# Altium PCB PCBPIC80_A3987.PcbDoc
Units mm, origin at the board's own origin, x right, y up, seen from the top; angles counter-clockwise.
Board outline 152.4 x 101.6 mm, 2 copper layers (Top Layer, Bottom Layer); 81 components, 99 nets, 380 pads, 152 vias.
Unrouted connection lines stored in the file: 1.
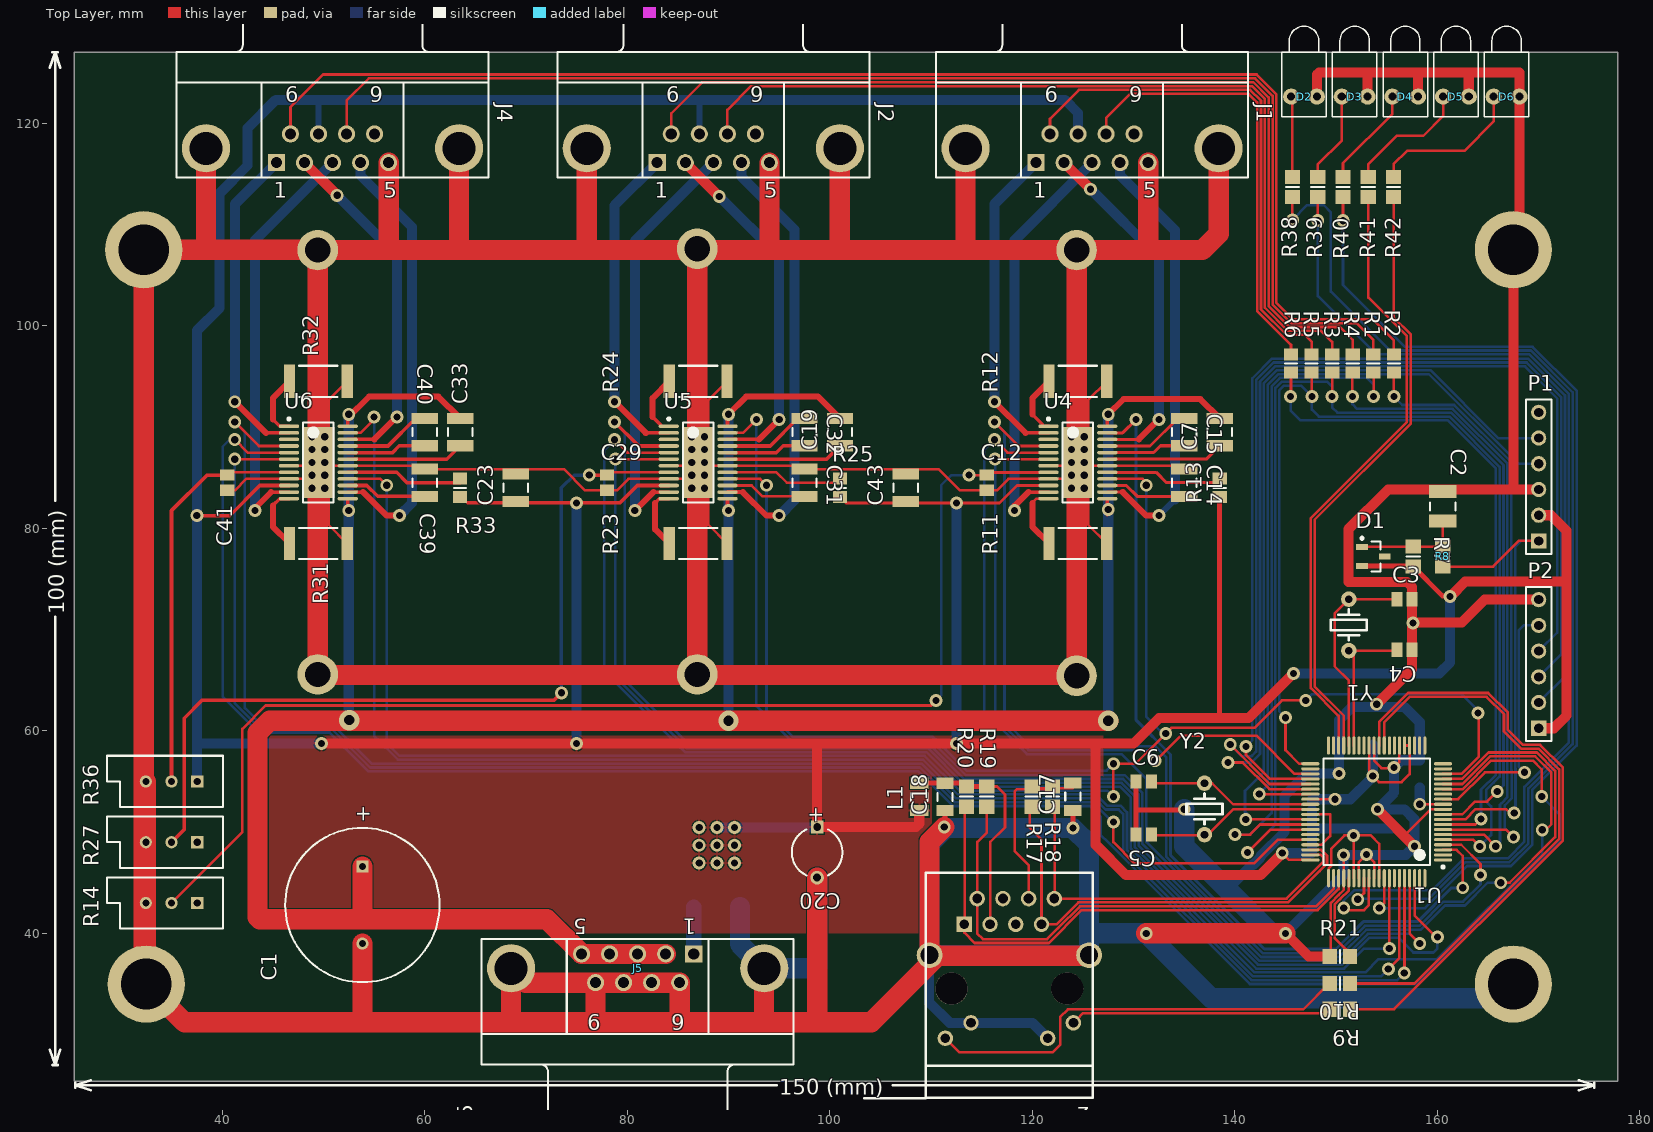
[diagram p0: Top Layer view]
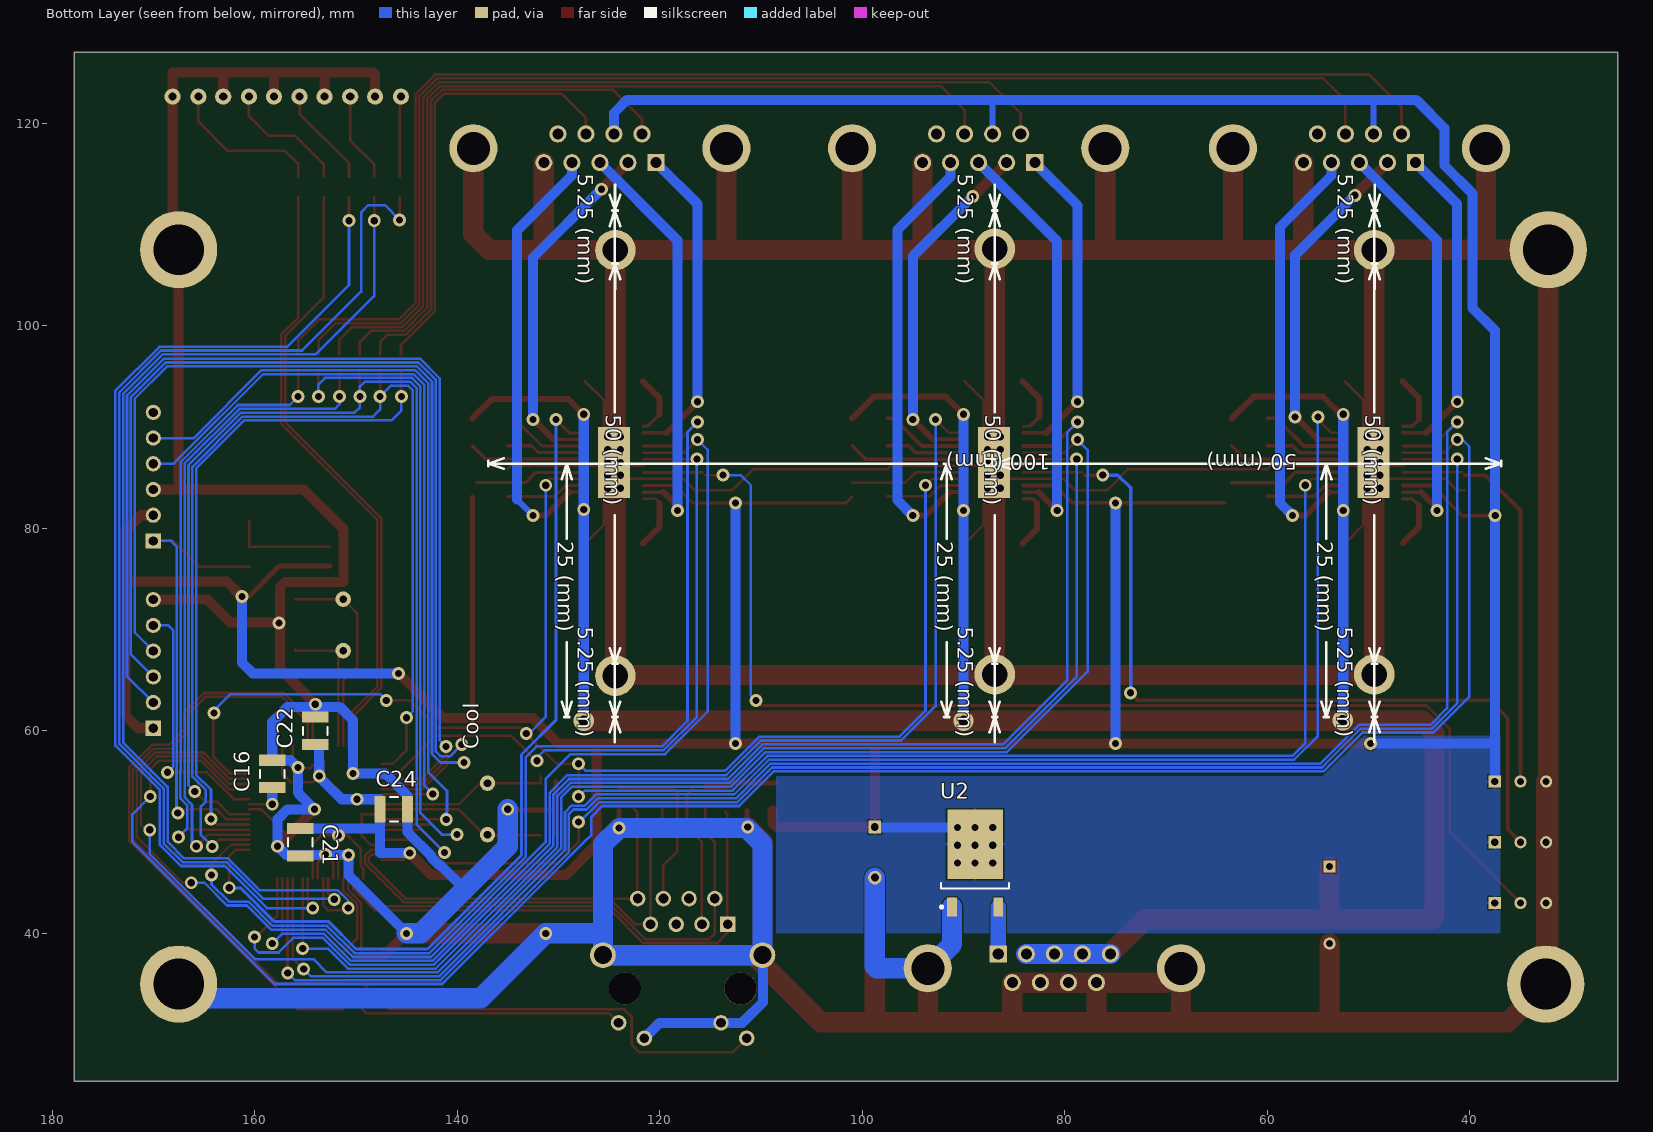
[diagram p1: Bottom Layer view, seen from below]

## Layer stack, top to bottom
Top Layer: signal copper 0.0356
Dielectric: dielectric 0.32, FR-4, Dk 4.8
Bottom Layer: signal copper 0.0356

## Board outline
25.4,25.4 177.8,25.4 177.8,127 25.4,127

## Design rules (kind name [scope] priority, off if disabled: settings)
Clearance [All] p1: gap=0.127
PolygonConnect [All] p1: connectstyle=Relief reliefconductorwidth=0.254 reliefentries=4 polygonreliefangle="90 Angle"
RoomDefinition SheetPIC80_A9387 [InComponentClass('SheetPIC80_A9387')] p1: confinementstyle=ConfineOut formatcopy=TRUE lockcomponents=FALSE outline 140,-12.1 161,-12.1 161,21.8 140,21.8
RoutingVias [All] p1: holewidth=0.711 width=1.27 viastyle="Through Hole" minholewidth=0.711 minwidth=1.27 maxholewidth=0.711 maxwidth=1.27
SilkscreenOverComponentPads [All] p1: minsilkscreentomaskgap=0.254
SolderMaskExpansion [All] p1: expansion=0.102
Width [All] p1: maxlimit=2.54 minlimit=0.254 preferedwidth=0.254
27 further rules are at their usual default settings.

## Components (designator, comment, footprint, x,y, rotation, side; value= is the part's Value field where it differs from the comment)
*2 "LU1T516-43" EthernetCON 117.729,34.544 r270 top
C1 "Cap Pol1" RB7.6-15 53.848,42.799 r90 top
C2 "Cap" CAPC3225N 160.528,82.169 r270 top
C3 "Cap" CAPC2012L 156.75,73 r0 top
C4 "Cap" CAPC2012L 156.75,68 r180 top
C5 "Cap" CAPC2012L 131,49.75 r180 top
C6 "Cap" CAPC2012L 131,55 r0 top
C7 "Cap" RESC3225L 138.5,89.5 r90 top
C12 "Cap" CAPC2012L 115.5,84.5 r90 top
C14 "Cap" RESC3225L 135,84.5 r270 top
C15 "Cap" RESC3225L 135,89.5 r270 top
C16 "Cap" CAPC3225L 158.25,55.75 r90 bottom
C17 "Cap" CAPC3216L 124,53.5 r90 top
C18 "Cap" CAPC3216L 111.379,53.467 r90 top
C19 "Cap" RESC3225L 101,89.5 r90 top
C20 "Cap Pol1" CAPPR5-5x5 98.75,48 r270 top
C21 "Cap" CAPC3225L 155.5,49 r270 bottom
C22 "Cap" CAPC3225L 154,60 r90 bottom
C23 "Cap" CAPC3225L 69,84 r90 top
C24 "Cap" CAPC3225L 146.25,52.25 r180 bottom
C29 "Cap" CAPC2012L 78,84.5 r90 top
C31 "Cap" RESC3225L 97.5,84.5 r270 top
C32 "Cap" RESC3225L 97.5,89.5 r270 top
C33 "Cap" RESC3225L 63.5,89.5 r90 top
C39 "Cap" RESC3225L 60,84.5 r270 top
C40 "Cap" RESC3225L 60,89.5 r270 top
C41 "Cap" CAPC2012L 40.5,84.5 r90 top
C43 "Cap" CAPC3225L 107.5,84 r90 top
Cool "Cooler" "PCBComponent_1 - duplicate" 37,61.5 r0 bottom
D1 "Diode" SOT95P240-3N 153.67,77.216 r0 top
D2 "Power" LED-1 146.825,122.625 r90 top
D3 "Run" LED-1 151.825,122.625 r90 top
D4 "Alfa" LED-1 156.825,122.625 r90 top
D5 "Delta" LED-1 161.825,122.625 r90 top
D6 "Focus" LED-1 166.825,122.625 r90 top
J1 "D Connector 9" D-SUB-9 125.9,116.1 r0 top
J2 "D Connector 9" D-SUB-9 88.5,116.1 r0 top
J4 "D Connector 9" D-SUB-9 50.9,116.1 r0 top
J5 "D Connector 9" D-SUB-9 81.026,37.973 r180 top
L1 "Inductor" INDC3216AL 108.839,53.467 r90 top
P1 "Программатор" HDR1X6 170,78.75 r90 top
P2 "SPI" HDR1X6 170,60.25 r90 top
R1 "Res2" RESC2012N 153.67,96.266 r270 top
R2 "Res2" RESC2012N 155.702,96.266 r270 top
R3 "Res2" RESC2012N 149.606,96.266 r270 top
R4 "Res2" RESC2012N 151.638,96.266 r270 top
R5 "Res2" RESC2012N 147.574,96.266 r270 top
R6 "Res2" RESC2012N 145.542,96.266 r270 top
R7 "Res2" RESC2012M 157.607,77.216 r270 top
R8 "Res2" RESC2012M 160.528,77.216 r90 top
R9 "Res2" RESC2012M 150.368,32.512 r180 top
R10 "Res2" RESC2012M 150.368,35.052 r180 top
R11 "Res2" RESC6332L 124.5,78.5 r180 top
R12 "Res2" RESC6332L 124.5,94.5 r180 top
R13 "Res2" RESC2012N 138.5,84 r90 top
R14 "RPot" VR5 35,43 r180 top
R17 "Res2" RESC2012M 120,53.5 r270 top
R18 "Res2" RESC2012M 122,53.5 r270 top
R19 "Res2" RESC2012M 115.5,53.5 r270 top
R20 "Res2" RESC2012M 113.5,53.5 r270 top
R21 "Res2" RESC2012M 150.368,37.719 r0 top
R23 "Res2" RESC6332L 87,78.5 r180 top
R24 "Res2" RESC6332L 87,94.5 r180 top
R25 "Res2" RESC2012N 101,84 r90 top
R27 "RPot" VR5 35,49 r180 top
R31 "Res2" RESC6332L 49.5,78.5 r180 top
R32 "Res2" RESC6332L 49.5,94.5 r180 top
R33 "Res2" RESC2012N 63.5,84 r90 top
R36 "RPot" VR5 35,55 r180 top
R38 "Res2" RESC2012M 145.675,113.7 r90 top
R39 "Res2" RESC2012M 148.175,113.7 r90 top
R40 "Res2" RESC2012M 150.675,113.7 r90 top
R41 "Res2" RESC2012M 153.175,113.7 r90 top
R42 "Res2" RESC2012M 155.675,113.7 r90 top
U1 "PIC18F87J60-I/PT" TQFP-PT80_N 154,52 r180 top
U2 "LM1117DT-3.3" TD03B_N 88.85,46.95 r90 bottom
U4 "A3987" "TSOP65P640_HS-24AM - duplicate" 124.5,86.5 r0 top
U5 "A3987" "TSOP65P640_HS-24AM - duplicate" 87,86.5 r0 top
U6 "A3987" "TSOP65P640_HS-24AM - duplicate" 49.5,86.5 r0 top
Y1 "XTAL" Quartz 151.25,73 r270 top
Y2 "XTAL" Quartz 137,49.75 r90 top

## Footprints (in the part's own frame and the unit in brackets; to place one, negate y for a bottom-side part, rotate by r counter-clockwise, add the part's x,y. Pads: shape width x height; smd on the part's side, far side on the other; paste and mask are expansions set on the pad)
CAPC2012L [mm] "Chip Capacitor, Body 2.0x1.3mm, IPC High Density"
  rect 1.1x1.4 smd: 1(-0.75,0) 2(0.75,0)
  body extent -1.1,-0.72 1.1,0.72, height 1.4
CAPC3216L [mm] "Chip Capacitor, Body 3.2x1.6mm, IPC High Density"
  rect 1.1x1.7 smd: 1(-1.35,0) 2(1.35,0)
  silkscreen extent -0.4,-0.75 0.4,0.75, body extent -1.7,-0.9 1.7,0.9, height 1.3
CAPC3225L [mm] "Chip Capacitor, Body 3.2x2.5mm, IPC High Density"
  rect 1.1x2.6 smd: 1(-1.35,0) 2(1.35,0)
  silkscreen extent -0.4,-1.2 0.4,1.2, body extent -1.7,-1.35 1.7,1.35, height 1.5
CAPC3225N [mm] "Chip Capacitor, Body 3.2x2.5mm, IPC Medium Density"
  rect 1.3x2.7 smd: 1(-1.45,0) 2(1.45,0)
  silkscreen extent -0.4,-1.25 0.4,1.25, body extent -1.7,-1.35 1.7,1.35, height 1.5
CAPPR5-5x5 [mm] "Capacitor, Electrolytic, Radial; Body 5 x 5 mm (Dia.xH typ); Pin Spacing 5 mm (typ)"
  rect 1.25x1.25 hole 0.75: 1(-2.5,0)
  round 1.35 hole 0.8: 2(2.5,0)
  silkscreen extent -2.26,-2.5 2.27,2.5
D-SUB-9 [mm] "Connector"
  rect 1.69x1.69 hole 1.09: 1(-5.54,0)
  round 1.69 hole 1.09: 2(-2.77,0) 3(0,0) 4(2.77,0) 5(5.54,0) 6(-4.155,2.84) 7(-1.385,2.84) 8(1.385,2.84) 9(4.155,2.84)
  round 4.76 hole 3.26: 10(-12.495,1.42) 11(12.495,1.42)
  silkscreen extent -15.4,-1.48 15.4,16.92, body extent -15.49,-1.52 15.49,17.02, height 6.35
EthernetCON [mil] "Ethernet connector w/two LEDs"
  rect 60x60 hole 38: 1(-250,-175)
  round 60 hole 38: 2(-350,-125) 3(-250,-75) 4(-350,-25) 5(-250,25) 6(-350,75) 7(-250,125) 8(-350,175) 9(193,-249) 10(133,-149) 11(193,149) 12(133,249)
  round 100 hole 70: 13(-130,-310) 14(-130,310)
  round 125 hole 125 unplated: 15(0,-225) 16(0,225)
  silkscreen extent -450,-325 425,325, body extent -450,-325 425,325, height 550
HDR1X6 [mm] "Connector; Header; 6 Position"
  rect 1.5x1.5 hole 0.9: 1(0,0)
  round 1.5 hole 0.9: 2(2.54,0) 3(5.08,0) 4(7.62,0) 5(10.16,0) 6(12.7,0)
  silkscreen extent -1.27,-1.27 13.97,1.27
INDC3216AL [mm] "Chip Inductor, Body 3.2x1.6mm, IPC High Density"
  rect 1.1x1.8 smd: 1(-1.35,0) 2(1.35,0)
  silkscreen extent -0.4,-0.8 0.4,0.8, body extent -1.7,-0.9 1.7,0.9, height 0.55
LED-1 [mm] "Typical RED GaAs LED; 2 Leads"
  round 1.6 hole 0.8: 1(0,1.27) 2(0,-1.27)
  silkscreen extent -2,-2.2 6.95,2.2
"PCBComponent_1 - duplicate" [mm]
  round 4 hole 2.5: 1(12.446,-45.974) 2(49.911,-46.101) 3(87.376,-45.974) 4(87.376,-3.937) 5(49.911,-4.064) 6(12.446,-4.064)
  silkscreen extent -0.09,-52.43 99.91,2.65, body extent 0,-50.04 100.08,0, height 18
Quartz [mil]
  round 60 hole 30: 1(0,0) 2(200,0)
  silkscreen extent 40,-70 160,70, body extent -100,-100 300,100, height 90
RB7.6-15 [mm] "Polarized Capacitor (Radial); 2 Leads"
  rect 1.2x1.2 hole 0.7: 1(3.81,0)
  round 1.2 hole 0.7: 2(-3.81,0)
  silkscreen extent -7.62,-7.62 7.62,7.62
RESC2012M [mm] "Chip Resistor, Body 2.0x1.2mm, IPC Low Density"
  rect 1.4x1.5 smd: 1(-1,0) 2(1,0)
  silkscreen extent 0,-0.65 0,0.65, body extent -1.07,-0.7 1.07,0.7, height 0.7
RESC2012N [mm] "Chip Resistor, Body 2.0x1.2mm, IPC Medium Density"
  rect 1.2x1.4 smd: 1(-0.9,0) 2(0.9,0)
  silkscreen extent 0,-0.6 0,0.6, body extent -1.07,-0.7 1.07,0.7, height 0.7
RESC3225L [mm] "Chip Resistor, Body 3.2x2.5mm, IPC High Density"
  rect 1.1x2.6 smd: 1(-1.35,0) 2(1.35,0)
  silkscreen extent -0.4,-1.2 0.4,1.2, body extent -1.68,-1.32 1.68,1.32, height 0.9
RESC6332L [mm] "Chip Resistor, Body 6.3x3.2mm, IPC High Density"
  rect 1.1x3.3 smd: 1(-2.85,0) 2(2.85,0)
  silkscreen extent -1.9,-1.55 1.9,1.55, body extent -3.22,-1.68 3.22,1.68, height 0.9
SOT95P240-3N [mm] "SOT23, 3-Leads, Body 2.9x1.3mm, Pitch 0.95mm, Lead Span 2.4mm, IPC Medium Density"
  rect 1.15x0.6 smd: 1(-1.125,0.95) 2(-1.125,-0.95) 3(1.125,0)
  silkscreen extent -1.25,-1.5 0.7,1.92, body extent -0.7,-1.5 0.7,1.5, height 1.14
TD03B_N [mm] "D-PAK, 4-Leads, Body 6.1x6.6mm, Pitch 2.29mm, Lead Span 9.7mm, IPC Medium Density"
  rect 1.9x0.95 smd: 1(-4.35,2.28) 3(-4.35,-2.28)
  rect 6.9x5.5 smd: 4(1.85,0)
  silkscreen extent -4.47,-3.35 -2,3.43, body extent -2.5,-3.35 3.7,3.35, height 2.38
TQFP-PT80_N [mm] "Thin QFP, 80-Leads, Body 12x12mm, Pitch 0.5mm, IPC Medium Density"
  oval 1.8x0.3 smd: 1(-6.55,4.75) 2(-6.55,4.25) 3(-6.55,3.75) 4(-6.55,3.25) 5(-6.55,2.75) 6(-6.55,2.25) 7(-6.55,1.75) 8(-6.55,1.25) 9(-6.55,0.75) 10(-6.55,0.25) 11(-6.55,-0.25) 12(-6.55,-0.75) 13(-6.55,-1.25) 14(-6.55,-1.75) 15(-6.55,-2.25) 16(-6.55,-2.75) 17(-6.55,-3.25) 18(-6.55,-3.75) 19(-6.55,-4.25) 20(-6.55,-4.75) 41(6.55,-4.75) 42(6.55,-4.25) 43(6.55,-3.75) 44(6.55,-3.25) 45(6.55,-2.75) 46(6.55,-2.25) 47(6.55,-1.75) 48(6.55,-1.25) 49(6.55,-0.75) 50(6.55,-0.25) 51(6.55,0.25) 52(6.55,0.75) 53(6.55,1.25) 54(6.55,1.75) 55(6.55,2.25) 56(6.55,2.75) 57(6.55,3.25) 58(6.55,3.75) 59(6.55,4.25) 60(6.55,4.75)
  oval 0.3x1.8 smd: 21(-4.75,-6.55) 22(-4.25,-6.55) 23(-3.75,-6.55) 24(-3.25,-6.55) 25(-2.75,-6.55) 26(-2.25,-6.55) 27(-1.75,-6.55) 28(-1.25,-6.55) 29(-0.75,-6.55) 30(-0.25,-6.55) 31(0.25,-6.55) 32(0.75,-6.55) 33(1.25,-6.55) 34(1.75,-6.55) 35(2.25,-6.55) 36(2.75,-6.55) 37(3.25,-6.55) 38(3.75,-6.55) 39(4.25,-6.55) 40(4.75,-6.55) 61(4.75,6.55) 62(4.25,6.55) 63(3.75,6.55) 64(3.25,6.55) 65(2.75,6.55) 66(2.25,6.55) 67(1.75,6.55) 68(1.25,6.55) 69(0.75,6.55) 70(0.25,6.55) 71(-0.25,6.55) 72(-0.75,6.55) 73(-1.25,6.55) 74(-1.75,6.55) 75(-2.25,6.55) 76(-2.75,6.55) 77(-3.25,6.55) 78(-3.75,6.55) 79(-4.25,6.55) 80(-4.75,6.55)
  silkscreen extent -6.68,-5.25 5.25,5.57, body extent -6,-6 6,6, height 1.2
"TSOP65P640_HS-24AM - duplicate" [mm] "TSOP, 24-Leads, Body 7.8x4.4mm, Pitch 0.65mm, IPC Low Density"
  oval 2x0.35 smd: 1(-2.9,3.575) 2(-2.9,2.925) 3(-2.9,2.275) 4(-2.9,1.625) 5(-2.9,0.975) 6(-2.9,0.325) 7(-2.9,-0.325) 8(-2.9,-0.975) 9(-2.9,-1.625) 10(-2.9,-2.275) 11(-2.9,-2.925) 12(-2.9,-3.575) 13(2.9,-3.575) 14(2.9,-2.925) 15(2.9,-2.275) 16(2.9,-1.625) 17(2.9,-0.975) 18(2.9,-0.325) 19(2.9,0.325) 20(2.9,0.975) 21(2.9,1.625) 22(2.9,2.275) 23(2.9,2.925) 24(2.9,3.575)
  rect 3.15x7 all layers, no hole: 25(0,0)
  silkscreen extent -3.02,-3.95 1.5,4.42, body extent -2.25,-3.95 2.25,3.95, height 1.1
VR5 [mm] "Variable Resistor, Thru-Hole; 3 Leads"
  rect 1.2x1.2 hole 0.7: 1(-2.54,0)
  round 1.2 hole 0.7: 2(0,0) 3(2.54,0)
  silkscreen extent -5.08,-2.54 6.35,2.54

## Part data
C1 C20: "Polarized Capacitor (Radial)"
C2 C3 C4 C5 C6 C7 C12 C14 C15 C16 C17 C18 C19 C21 C22 C23 C24 C29 C31 C32 C33 C39 C40 C41 C43: "Capacitor"
D1: "Default Diode"
D2 D3 D4 D5 D6: library part LED1, "Typical RED GaAs LED"
J1 J2 J4 J5: "Receptacle Assembly, 9 Position, Right Angle"
P1 P2: library part "Header 6", "Header, 6-Pin"
R1 R2 R3 R4 R5 R6 R7 R8 R9 R10 R11 R12 R13 R17 R18 R19 R20 R21 R23 R24 R25 R31 R32 R33 R38 R39 R40 R41 R42: "Resistor"
R14 R27 R36: "Potentiometer"
U1: "High Performance, 1-Mbit Flash Microcontroller with Ethernet, 128K Flash, 80-Pin TQFP, Industrial Temperature Range"
U2: "800mA Low-Dropout Linear Regulator"
U4 U5 U6: "Stepper Controller"
Y1 Y2: "Crystal Oscillator"

## Free pads (board coordinates)
  round 7.62 hole 5: 1(32.25,107.5) 1(32.5,35) 1(167.5,35) 1(167.5,107.5)

## Via types
v1: diameter 1.27, hole 0.711, Top Layer to Bottom Layer, 149 vias
v2: diameter 2, hole 1, Top Layer to Bottom Layer, 3 vias

## Nets (pads, with @x,y where several pads share a name; then routed paths per layer and width w, separated by ;. In a path a pad name is that pad's centre, name@x,y a point inside that pad or via, vN(x,y) a via of type N, cw(c..) or ccw(c..) an arc to the next point about the centre after c; other vN are vias at no path point)
+5: J5.1 U2.3 | length 4.6
  Bottom Layer w1.5: J5.1@86.57,37.977 U2.3
+30: C1.1 C7.2 C19.2 C33.2 J5.2 J5.3 J5.4 J5.5 U4.13 U4.24 U5.13 U5.24 U6.13 U6.24 | length 292.7
  Top Layer w0.35: v1@52.4,81.65 U6.13 ; U6.24 v1@52.4,90.9 ; v1@89.9,82.1 U5.13 ; U5.24 v1@89.9,91.15 ; v1@127.4,81.35 U4.13 ; U4.24 v1@127.4,91
  Top Layer w0.6: v1@52.4,90.9 54.5,93 61.35,93 C33.2 ; v1(90,91.25) 91.75,93 98.85,93 C19.2 ; v1(127.5,91.25) 129,92.75 136.6,92.75 C7.2
  Top Layer w2: v2@52.553,61.053 v2@52.5,61 ; 53.848,41.997 C1.1 ; J5.2 J5.5 72.059,41.4 53.251,41.4 43.7,41.4 43.5,41.6 43.5,59.8 44.7,61 v2@52.5,61 ; v2(127.5,61) v2(90,61) v2@52.5,61
  Bottom Layer w1: v1(52.5,91.25) v1(52.5,81.75) 52.5,61 v2@52.553,61.053 ; v2(90,61) v1(90,81.75) v1(90,91.25) ; v2(127.5,61) v1(127.5,81.85) v1(127.5,91.25)
  Bottom Layer w2: J5.5 J5.2
  other v2: 52.553,61.053
DIRALFA: U1.17 U4.5 | length 127.6
  Top Layer w0.254: v1(116.25,88.75) 117.525,87.475 U4.5 ; U1.17 162.434,55.25 165.041,57.857 169.815,57.857 171.631,56.041 171.631,49.497 167.134,45 v1(166.25,45)
  Bottom Layer w0.254: v1(116.25,88.75) 115.25,87.75 115.25,61.916 119.465,57.701 126.624,57.701 128.799,57.701 131.25,55.25 131.25,49.001 142.584,37.667 150.301,37.667 152.971,40.337 156.491,40.337 157.452,40.337 158.337,40.337 159.574,41.574 160.75,42.75 162.7,42.75 164.95,45 v1(166.25,45)
DIRDELTA: U1.16 U5.5 | length 163.1
  Top Layer w0.254: v1(78.75,88.75) 80.025,87.475 U5.5 ; U1.16 162.472,54.75 165.198,57.476 169.658,57.476 171.25,55.884 171.25,50.775 v1@170.525,50.05
  Bottom Layer w0.254: v1(78.75,88.75) 77.75,87.75 77.75,65.861 85.706,57.905 109.528,57.905 112.95,54.483 128.651,54.483 129.726,53.408 129.726,48.37 141.953,36.143 152.893,36.143 154.2,37.45 159.957,37.45 170.35,47.843 170.35,49.875 v1@170.725,50.25
  other v1: 170.35,50.225
DIRFOCUS: U1.15 U6.5 | length 201.8
  Top Layer w0.254: v1(41.25,88.75) 42.525,87.475 U6.5 ; U1.15 162.511,54.25 165.311,57.05 169.45,57.05 170.3,56.2 v1(170.3,53.525)
  Bottom Layer w0.254: v1(41.25,88.75) 40.75,88.75 40.05,88.05 40.05,63.372 43.589,59.833 50.614,59.833 53.857,56.59 53.857,56.588 54.445,56 55.007,56 108.739,56 112.161,52.578 125.672,52.578 126.75,51.5 126.75,49.729 127.5,48.979 131,45.479 141.479,35 158.046,35 172.075,49.029 172.075,51.75 v1(170.3,53.525)
GND: *2.10 *2.11 *2.13 *2.14 C1.2 C2.1 C3.2 C4.1 C5.2 C6.1 C12.1 C14.1 C16.2 C17.1 C18.1 C20.2 C21.2 C22.2 C23.2 C24.2 C29.1 C31.1 C39.1 C41.1 C43.2 Cool.1 Cool.2 Cool.3 Cool.4 Cool.5 Cool.6 D2.2 D3.2 D4.2 D5.2 D6.2 J1.5 J1.10 J1.11 J2.5 J2.10 J2.11 J4.5 J4.10 J4.11 J5.6 J5.7 J5.8 J5.9 J5.10 J5.11 P1.3 P2.6 pad.1 R11.1 R12.1 R14.3 R21.1 R23.1 R24.1 R27.3 R31.1 R32.1 R36.3 U1.11 U1.26 U1.31 U1.51 U1.57 U1.64 U1.67 U1.70 U2.1 U4.7 U4.9 U4.18 U4.25 U5.7 U5.9 U5.18 U5.25 U6.7 U6.9 U6.18 U6.25 | length 1212.7
  Top Layer w0.254: C41.1 41.25,83.75 42.375,84.875 U6.9 U6.25@48.375,84.875 ; U6.7 U6.25@48.325,86.175 ; U6.25@50.5,84 50.5,80.35 R31.1 ; U6.25@50.5,89 50.5,92.65 R32.1 ; U6.25@50.675,86.175 U6.18 59.675,86.175 C39.1 73.75,85.85 75.85,83.75 C29.1 79,83.75 80.125,84.875 U5.9 U5.25@85.875,84.875 ; U5.7 U5.25@85.825,86.175 ; U5.25@88,84 88,80.35 R23.1 ; U5.25@88,89 88,92.65 R24.1 ; U5.25@88.175,86.175 U5.18 97.175,86.175 C31.1 110.75,85.85 112.85,83.75 C12.1 116.5,83.75 117.625,84.875 U4.9 U4.25@123.375,84.875 ; U4.7 U4.25@123.325,86.175 ; U4.25@125.5,84 125.5,80.35 R11.1 ; U4.25@125.5,89 125.5,92.65 R12.1 ; U4.25@125.675,86.175 U4.18 134.675,86.175 C14.1 ; U1.57 148.55,48.75 149.4,49.6 149.4,51.75 U1.51 ; R21.1@149.467,37.719 149.467,43.013 150.224,43.77 150.231,43.77 150.75,44.289 U1.64 150.75,47.725 v1(150.725,47.75) ; U1.67 152.25,47.025 v1(153,47.775) 153.75,47.025 U1.70 ; U1.31 153.75,57.05 154.475,56.325 155.675,56.325 v1(155.725,56.375) 156.25,56.9 U1.26 ; 156.7,49.625 159.324,52.25 U1.11 ; C2.1 C2.1@160.739,83.83
  Top Layer w0.5: v1@111.379,50.579 C18.1 ; v1(124,50.4) C17.1 ; C5.2 130.25,52.2 ; C6.1 130.25,52.2 ; v1@134.95,52.2 130.25,52.2
  Top Layer w1: v1(145,40) 147.281,37.719 R21.1 ; D2.2 148.095,124.795 148.3,125 168.1,125 D6.2@168.1,122.63 ; 153.095,124.795 D3.2 D3.2@153.2,122.73 ; v1(154,62.625) 157.5,66.125 v1@157.5,70.65 ; v1(154.075,52.25) v1(157.725,48.6) ; C4.1 C3.2 157.5,74.2 157,74.7 151.2,74.7 151.2,79.9 155.13,83.83 P1.3 ; v1@157.65,70.5 157.85,70.7 162.4,70.7 164.65,72.95 P2.6 ; D4.2 158.095,124.995 ; D5.2 163.095,124.995 ; 167.5,83.93 167.5,107.5 168.1,108.1 D6.2@168.1,122.63 ; D6.2 D6.2@168.1,122.63
  Top Layer w2: pad.1@32.25,35.25 32.25,107.5 Cool.1@49.42,107.5 ; pad.1@32.46,35.04 R36.3 ; pad.1@32.5,35 36.275,31.225 53.8,31.225 104.1,31.225 ; 38.405,107.705 J4.10 ; Cool.6 Cool.1 Cool.3 ; Cool.6@49.498,65.512 124.301,65.512 Cool.4 Cool.3 ; 53.848,31.273 C1.2 ; 56.44,107.614 J4.5 ; 63.395,107.669 J4.11 ; 68.531,31.386 J5.11 69.951,35.133 J5.9 ; 76.005,107.779 J2.10 ; 76.871,31.426 J5.9 ; 85.181,31.568 J5.6 J5.9 ; Cool.5 Cool.2 ; 93.5,31.225 J5.10@93.5,36.35 ; 94.04,107.514 J2.5 ; 98.75,31.225 C20.2 ; 100.995,107.769 J2.11 ; 104.238,31.363 110.721,37.846 *2.13 109.855,49.055 v1(111.3,50.5) ; *2.13@109.905,37.796 125.553,37.796 *2.14 ; 113.405,107.579 J1.10 ; v1(131.25,40) v1(145,40) ; 131.44,107.614 J1.5 ; J1.11 138.395,109.095 136.774,107.474 Cool.3
  Bottom Layer w1: *2.13@109.799,37.79 109.799,33.201 111.834,31.166 119.99,31.166 *2.11 ; 139.25,44.35 141.638,46.738 141.773,46.738 142.512,47.477 142.512,47.612 144.9,50 C24.2 144.9,53.6 147.075,55.775 v1(150.275,55.775) 150.275,61.046 151.6,62.371 154,62.371 156.729,62.371 158.25,60.85 C16.2 156.45,57.1 v1(155.725,56.375) 155.725,54.675 155.725,53.9 v1(154.075,52.25) 156.75,52.25 157.725,51.275 v1(157.725,48.6) 156.875,47.75 v1(150.725,47.75) 150.725,45.725 v1(145,40)
  Bottom Layer w2: U2.1 91.13,38.944 J5.10 98.553,36.553 98.75,36.75 C20.2 ; 125.603,40 v1(131.25,40) 137.65,33.6 166.1,33.6 pad.1@167.5,35 ; v1(135,52.25) 135,48.6 143.6,40 v1(145,40) ; *2.13 *2.14 125.603,48.797 v1(124,50.4) 111.4,50.4 109.855,48.855 *2.13
  other v1: 157.575,70.65 48.865,83.96 50.135,83.96 86.365,83.96 87.635,83.96 123.865,83.96 125.135,83.96 48.865,85.23 50.135,85.23 86.365,85.23 87.635,85.23 123.865,85.23 125.135,85.23 48.865,86.5 50.135,86.5 86.365,86.5 87.635,86.5 123.865,86.5 125.135,86.5 48.865,87.77 50.135,87.77 86.365,87.77 87.635,87.77 123.865,87.77 125.135,87.77 48.865,89.04 50.135,89.04 86.365,89.04 87.635,89.04 123.865,89.04 125.135,89.04
MS1_ALFA: U1.4 U4.4 | length 107.8
  Top Layer w0.254: v1(116.25,90.5) 118.625,88.125 U4.4 ; U1.4 162.35,48.75 164.25,46.85 v1(164.25,45.75)
  Bottom Layer w0.254: v1(116.25,90.5) 117.25,89.5 117.25,60.994 119.781,58.463 132.162,58.463 133.24,57.385 133.24,47.55 142.742,38.048 150.143,38.048 152.845,40.75 158.211,40.75 160.592,43.131 162.542,43.131 164.25,44.839 v1(164.25,45.75)
MS1_DELTA: U1.78 U5.4 | length 137.6
  Top Layer w0.254: U1.78 157.75,41.75 159.525,39.975 159.525,39.65 v1(160,39.65)
  Top Layer w0.35: v1@78.625,90.625 81.125,88.125 U5.4
  Bottom Layer w0.254: v1(78.75,90.5) 79.75,89.5 79.75,65 86.083,58.667 109.844,58.667 113.266,55.245 128.966,55.245 130.488,53.723 130.488,48.685 142.268,36.905 150.616,36.905 153.286,39.575 156.175,39.575 157.625,38.125 ; 157.625,38.111 159.611,38.111 160,38.5 v1(160,39.65) 159.936,39.714 v1@159.769,39.881
MS1_FOCUS: U1.76 U6.4 | length 172.5
  Top Layer w0.254: v1(41.25,90.5) 43.625,88.125 U6.4 ; v1@156.75,36.075 U1.76
  Bottom Layer w0.254: v1(41.25,90.5) 42.25,89.5 42.25,62.25 43.905,60.595 50.93,60.595 54.619,56.906 54.619,56.903 54.76,56.762 109.054,56.762 112.476,53.34 126.121,53.34 126.73,52.731 127.231,52.23 128.526,52.23 128.964,51.792 128.964,48.054 141.637,35.381 156.031,35.381 156.687,36.037 156.687,36.057 156.705,36.075 v1(156.725,36.075)
MS2_ALFA: U1.3 U4.23 | length 88.4
  Top Layer w0.254: U1.3 161.9,48.25 162.5,47.65 v1(162.5,44.5)
  Top Layer w0.3: U4.23 128.925,89.425 v1(130.25,90.75)
  Bottom Layer w0.3: v1(130.25,90.75) 130.25,61.05 133.644,57.656 133.644,47.717 142.909,38.452 149.975,38.452 152.677,41.154 158.044,41.154 161.39,44.5 v1(162.5,44.5)
MS2_DELTA: U1.77 U5.23 | length 118.9
  Top Layer w0.254: U5.23 91.425,89.425 v1(92.75,90.75) ; U1.77 157.25,40 v1(158.25,39)
  Bottom Layer w0.254: v1(92.75,90.75) 92.75,62.45 96.152,59.048 110.001,59.048 113.423,55.626 129.124,55.626 130.869,53.881 130.869,48.843 142.426,37.286 150.458,37.286 153.128,39.956 156.333,39.956 157.294,39.956 v1(158.25,39)
MS2_FOCUS: U1.75 U6.23 | length 157
  Top Layer w0.254: U6.23 53.675,89.425 55,90.75 v1(55,91) v1@55,91.25 ; v1(155.15,36.475) 156.25,37.575 U1.75
  Bottom Layer w0.254: v1(55,91) 55,59.5 57.357,57.143 109.212,57.143 112.634,53.721 126.279,53.721 127.111,52.889 127.389,52.611 128.684,52.611 129.345,51.95 129.345,48.212 141.795,35.762 154.437,35.762 v1(155.15,36.475)
Net*2_1: *2.1 R20.2 U1.63 | length 52.7
  Top Layer w0.254: *2.1 113.284,40.066 114.3,39.05 121.625,39.05 124.866,42.291 148.178,42.291 150.25,44.363 U1.63 ; *2.1@113.305,40.894 113.305,51.805 R20.2@113.5,52
Net*2_2: *2.2 R19.2 U1.62 | length 51.2
  Top Layer w0.254: *2.2 114.554,39.996 115.119,39.431 121.467,39.431 122.549,40.513 124.708,42.672 146.922,42.672 148.02,42.672 149.323,43.975 149.75,44.402 U1.62 ; *2.2@114.575,43.434 114.575,49.025 115.5,49.95 R19.2@115.5,52.25
Net*2_3: *2.3 C18.2 L1.2 R19.1 R20.1 | length 22.7
  Top Layer w0.254: R20.1@113.15,54.85 R20.1 ; R19.1 116.5,54.5 117.3,53.7 117.3,50.475 115.845,49.02 *2.3@115.845,40.894
  Top Layer w0.5: L1.2@108.5,54.85 111,54.85 R20.1@113.15,54.85 ; R20.1 R19.1
Net*2_6: *2.6 C17.2 R17.1 R18.1 | length 19.4
  Top Layer w0.254: *2.6 119.634,46.741 118.25,48.125 118.25,54 118.5,54.25 119.75,54.25 R18.1@122.5,54.25 ; R17.1@120.1,54.35 C17.2@124,54.35
Net*2_7: *2.7 R17.2 U1.58 | length 45.2
  Top Layer w0.254: R17.2@119.75,52.25 119.75,50.425 120.904,49.271 *2.7 122.391,40.894 124.55,43.053 145.267,43.053 148.358,46.144 149.096,46.882 149.096,47.675 148.521,48.25 U1.58
Net*2_8: *2.8 R18.2 U1.59 | length 38.8
  Top Layer w0.254: *2.8 124.384,43.434 145.109,43.434 148.715,47.04 148.715,47.517 148.482,47.75 U1.59 ; *2.8@122.195,43.445 122.195,51.945 R18.2@122.5,52.25
Net*2_9: *2.9 R10.2 | length 42.9
  Top Layer w0.254: *2.9 112.796,28.25 122,28.25 122.75,29 122.75,31.75 123.5,32.5 124.849,32.5 146.75,32.5 R10.2@149.335,35.085
Net*2_12: *2.12 R9.2 | length 25.4
  Top Layer w0.254: *2.12@124.388,31.5 125.007,32.119 148.975,32.119 R9.2
NetC2_2: C2.2 D1.1 R7.1 R8.2 | length 10.5
  Top Layer w0.254: D1.1 160.478,78.166 R8.2 C2.2
NetC3_1: C3.1 U1.36 Y1.1 | length 20.4
  Top Layer w0.254: U1.36 151.25,64.975 149.85,66.375 149.85,71.6 Y1.1 C3.1
NetC4_2: C4.2 U1.35 Y1.2 | length 14.4
  Top Layer w0.254: U1.35 151.75,67.42 Y1.2 155.92,67.92 C4.2
NetC5_1: C5.1 U1.50 Y2.1 | length 16.8
  Top Layer w0.254: C5.1@131.75,49.7 137.275,49.7 139.825,52.25 U1.50
NetC6_2: C6.2 U1.49 Y2.2 | length 17.2
  Top Layer w0.254: C6.2@131.75,55.5 131.75,54.825 137.755,54.825 139.83,52.75 U1.49
NetC7_1: C7.1 U4.19 | length 11.6
  Top Layer w0.3: U4.19 137.175,86.825 C7.1
NetC12_2: C12.2 R14.2 U4.8 | length 122
  Top Layer w0.254: R14.2 36.6,44.6 42,50 42,60.2 44.3,62.5 110,62.5 v1(110.5,63) ; v1(113.75,85.25) C12.2
  Top Layer w0.3: C12.2@115.775,85.525 U4.8
  Bottom Layer w0.254: v1(110.5,63) 111,63.5 111,84.25 112,85.25 v1(113.75,85.25)
NetC14_2: C14.2 U4.15 | length 8
  Top Layer w0.3: U4.15 129.275,84.225 130.35,83.15 C14.2
NetC15_1: C15.1 U4.21 | length 8.1
  Top Layer w0.3: U4.21 131.625,88.125 C15.1@134.375,90.875
NetC15_2: C15.2 U4.20 | length 7.9
  Top Layer w0.3: U4.20 131.975,87.475 132.65,88.15 C15.2
NetC16_1: C16.1 U1.12 | length 4
  Top Layer w0.254: v1(158.25,52.75) U1.12
  Bottom Layer w1: v1(158.25,52.75) 158.275,52.75 158.25,52.725 C16.1
NetC19_1: C19.1 U5.19 | length 11.6
  Top Layer w0.35: U5.19 99.675,86.825 C19.1
NetC29_2: C29.2 R27.2 U5.8 | length 82.1
  Top Layer w0.254: C29.2@78.275,85.525 U5.8
  Top Layer w0.35: R27.2 36.25,50.25 36.25,61.25 38,63 72.75,63 v1(73.5,63.75) ; v1(76.25,85.25) C29.2
  Bottom Layer w0.35: v1(73.5,63.75) 73.5,84 74.75,85.25 v1(76.25,85.25)
NetC31_2: C31.2 U5.15 | length 8
  Top Layer w0.254: U5.15 92.275,84.225 93.35,83.15 C31.2
NetC32_1: C32.1 U5.21 | length 8.7
  Top Layer w0.35: U5.21 94.125,88.125 96.85,90.85 C32.1
NetC32_2: C32.2 U5.20 | length 7.9
  Top Layer w0.35: U5.20 94.725,87.475 95.4,88.15 C32.2
NetC33_1: C33.1 U6.19 | length 11.6
  Top Layer w0.35: U6.19@52.402,86.827 62.177,86.827 C33.1
NetC39_2: C39.2 U6.15 | length 8
  Top Layer w0.35: U6.15 54.275,84.225 55.35,83.15 C39.2
NetC40_1: C40.1 U6.21 | length 8.7
  Top Layer w0.35: U6.21 56.375,88.125 59.1,90.85 C40.1
NetC40_2: C40.2 U6.20 | length 7.9
  Top Layer w0.35: U6.20 56.825,87.475 57.5,88.15 C40.2
NetC41_2: C41.2 R36.2 U6.8 | length 39.5
  Top Layer w0.254: C41.2@40.775,85.525 U6.8
  Top Layer w0.35: R36.2 35,81.75 38.5,85.25 C41.2
NetD2_1: D2.1 R38.2 | length 7.8
  Top Layer w0.254: R38.2 D2.1@145.675,122.505
NetD3_1: D3.1 R39.2 | length 8.9
  Top Layer w0.254: R39.2 148.175,115.925 150.555,118.305 D3.1
NetD4_1: D4.1 R40.2 | length 9.9
  Top Layer w0.254: R40.2 150.675,116.05 155.555,120.93 D4.1
NetD5_1: D5.1 R41.2 | length 12.5
  Top Layer w0.254: R41.2 153.175,115.95 155.975,118.75 158.6,118.75 160.555,120.705 D5.1
NetD6_1: D6.1 R42.2 | length 15.3
  Top Layer w0.254: R42.2 155.675,115.95 157,117.275 162.65,117.275 165.555,120.18 D6.1
NetJ1_1: J1.1 U4.2 | length 31.9
  Top Layer w0.35: 119.325,89.425 U4.2
  Top Layer w0.6: v1(116.25,92.5) 119.325,89.425
  Bottom Layer w1: v1(116.25,92.5) 116.25,111.99 J1.1
NetJ1_2: J1.2 U4.22 | length 35.1
  Top Layer w0.3: U4.22 130.525,88.775
  Top Layer w0.6: 130.525,88.775 v1(132.5,90.75)
  Top Layer w1: J1.2 v1(125.755,113.475)
  Bottom Layer w1: v1(125.755,113.475) 132.5,106.73 v1(132.5,90.75)
NetJ1_3: J1.3 U4.11 | length 41.9
  Top Layer w0.35: v1(118.25,81.75) v1@118.25,82.225 ; 119.6,83.575 U4.11
  Top Layer w0.6: v1@118.25,82.225 119.6,83.575
  Bottom Layer w1: v1(118.25,81.75) 118.25,108.45 J1.3
NetJ1_4: J1.4 U4.14 | length 43.8
  Top Layer w0.3: U4.14 128.925,83.575
  Top Layer w0.6: 128.925,83.575 131.25,81.25 v1(132.5,81.25)
  Bottom Layer w0.6: v1(132.5,81.25) 134.075,82.825
  Bottom Layer w1: J1.4 128.67,114.83 134.075,109.425 134.075,82.825
NetJ1_6: J1.6 R5.1 | length 52.1
  Top Layer w0.254: J1.6 121.745,120.42 124.606,123.281 141.514,123.281 142.576,122.219 142.576,101.619 145.084,99.111 146.889,99.111 147.574,98.426 R5.1
NetJ1_8: J1.8 R6.1 | length 44.1
  Top Layer w0.254: J1.8 127.285,120.535 129.65,122.9 141.356,122.9 142.195,122.061 142.195,101.461 145.542,98.114 R6.1
NetJ2_1: J2.1 U5.2 | length 32
  Top Layer w0.35: 81.825,89.425 U5.2
  Top Layer w0.6: v1(78.75,92.5) 81.825,89.425
  Bottom Layer w1: v1(78.75,92.5) 78.75,111.89 J2.1
NetJ2_2: J2.2 U5.22 | length 35.4
  Top Layer w0.35: U5.22 93.025,88.775
  Top Layer w0.6: 93.025,88.775 v1(95,90.75)
  Top Layer w1: J2.2 v1(89.08,112.75)
  Bottom Layer w0.6: J2.2 J2.2@85.73,116.352
  Bottom Layer w1: v1@89.048,112.802 95,106.85 v1(95,90.75)
NetJ2_3: J2.3 U5.11 | length 41.7
  Top Layer w0.35: 82.575,83.575 U5.11
  Top Layer w0.6: v1(80.75,81.75) 82.575,83.575
  Bottom Layer w1: v1(80.75,81.75) 80.75,108.35 J2.3
NetJ2_4: J2.4 U5.14 | length 43.7
  Top Layer w0.4: U5.14 91.425,83.575
  Top Layer w0.6: 91.425,83.575 93.75,81.25 v1(95,81.25)
  Bottom Layer w1: J2.4 91.27,114.73 96.5,109.5 96.5,82.75 v1(95,81.25)
NetJ2_6: J2.6 R4.1 | length 94.6
  Top Layer w0.254: J2.6 84.345,120.97 87.418,124.043 141.829,124.043 143.338,122.535 143.338,101.935 145.399,99.873 150.377,99.873 151.638,98.612 R4.1
NetJ2_8: J2.8 R3.1 | length 86.8
  Top Layer w0.254: J2.8 89.885,121.322 92.225,123.662 141.672,123.662 142.957,122.377 142.957,101.777 145.242,99.492 148.508,99.492 149.606,98.394 R3.1
NetJ4_1: J4.1 U6.2 | length 31.9
  Top Layer w0.35: 44.325,89.425 U6.2
  Top Layer w0.6: v1(41.25,92.5) 44.325,89.425
  Bottom Layer w1: v1(41.25,92.5) 41.25,111.99 J4.1
NetJ4_2: J4.2 U6.22 | length 34.6
  Top Layer w0.35: U6.22 55.025,88.775
  Top Layer w0.6: 55.025,88.775 v1(57.25,91)
  Top Layer w1: J4.2 v1(51.355,112.875)
  Bottom Layer w1: v1@51.386,112.84 57.25,106.975 v1(57.25,91)
NetJ4_3: J4.3 U6.11 | length 41.8
  Top Layer w0.35: v1(43.25,81.75) v1@43.25,82 ; 44.825,83.575 U6.11
  Top Layer w0.6: v1@43.25,82 44.825,83.575
  Bottom Layer w1: v1(43.25,81.75) 43.25,108.45 J4.3
NetJ4_4: J4.4 U6.14 | length 43.5
  Top Layer w0.35: U6.14 53.925,83.575
  Top Layer w0.6: 53.925,83.575 56.25,81.25 v1(57.5,81.25)
  Bottom Layer w1: J4.4 53.67,114.83 58.75,109.75 58.75,82.5 v1(57.5,81.25)
NetJ4_6: J4.6 R2.1 | length 137.3
  Top Layer w0.254: J4.6 46.745,121.595 49.955,124.805 142.145,124.805 144.1,122.85 144.1,102.25 145.715,100.635 153.615,100.635 155.702,98.548 R2.1
NetJ4_8: J4.8 R1.1 | length 129.8
  Top Layer w0.254: J4.8 52.285,122.234 54.475,124.424 141.987,124.424 143.719,122.693 143.719,102.093 145.557,100.254 151.996,100.254 153.67,98.58 R1.1
NetP1_1: P1.1 R8.1 U1.9 | length 47.1
  Top Layer w0.254: R8.1 165.491,76.216 168.025,78.75 P1.1 ; U1.9 162.75,51.25 163.775,52.275 165.1,52.275 166.793,52.275 167.193,51.875 v1(167.575,51.875)
  Bottom Layer w0.254: v1(167.575,51.875) 167.566,51.866 167.531,51.902 167.531,52.165 167.711,52.345 167.711,56.25 167.669,56.292 167.669,70.108 167.669,78.169 168.25,78.75 P1.1
NetP1_4: P1.4 U1.47 | length 76.7
  Top Layer w0.254: v1(142.4,53.75) U1.47
  Bottom Layer w0.254: v1(142.4,53.75) 143.238,54.588 143.238,57.035 143.238,57.472 143.238,57.714 143.238,58.433 143.238,82.503 143.238,91.646 143.238,92.592 143.238,94.166 144.298,95.226 159.143,95.226 167.649,86.72 167.999,86.37 P1.4
NetP1_5: P1.5 U1.52 | length 81
  Top Layer w0.254: v1(141.075,51.25) U1.52
  Bottom Layer w0.254: v1(141.075,51.25) 141.425,51.6 141,52.025 141,54.075 142.857,55.932 142.857,57.193 142.857,57.629 142.857,57.872 142.857,58.591 142.857,82.345 142.857,91.488 142.857,92.75 142.857,94.323 144.141,95.607 159.301,95.607 165.998,88.91 P1.5
NetP2_2: P2.2 U1.44 | length 109.4
  Top Layer w0.254: v1(141.1,58.45) 141.1,57.625 143.475,55.25 U1.44
  Bottom Layer w0.254: v1(141.1,58.45) 141.714,59.064 141.714,94.797 143.667,96.75 166.649,96.75 168.959,96.75 172.593,93.116 172.593,65.383 P2.2
NetP2_3: P2.3 U1.45 | length 110.2
  Top Layer w0.254: v1(139.543,58.643) 143.436,54.75 U1.45
  Bottom Layer w0.254: v1(139.543,58.643) 140.711,57.475 141.625,57.475 141.714,57.564 142.095,57.945 142.095,58.906 142.095,82.029 142.095,91.172 142.095,93.066 142.095,94.639 143.825,96.369 166.806,96.369 168.801,96.369 172.212,92.958 172.212,67.542 P2.3
NetP2_4: P2.4 U1.46 | length 106.5
  Top Layer w0.254: v1(139.325,56.875) 140.772,56.875 143.397,54.25 U1.46
  Bottom Layer w0.254: v1(139.325,56.875) 141.625,56.875 142.476,57.726 142.476,82.187 142.476,91.33 142.476,92.908 142.476,94.481 143.983,95.988 166.964,95.988 168.643,95.988 171.831,92.8 171.831,69.701 P2.4
NetP2_5: P2.5 U1.13 | length 25.6
  Top Layer w0.254: U1.13 162.05,53.25 164.7,55.9 v1(168.6,55.9)
  Bottom Layer w0.254: v1(168.6,55.9) 168.05,56.45 168.05,69.95 168.51,70.41 P2.5
NetR9_1: R9.1 U1.30 | length 60.8
  Top Layer w0.254: R9.1 155.723,32.512 172.393,49.182 172.393,56.357 170.131,58.619 168.431,58.619 166.953,60.097 166.953,61.797 165.012,63.738 157.099,63.738 154.25,60.889 U1.30
NetR10_1: R10.1 U1.29 | length 58
  Top Layer w0.254: R10.1 157.724,35.052 172.012,49.34 172.012,56.199 169.973,58.238 168.273,58.238 166.572,59.939 166.572,61.639 164.854,63.357 157.257,63.357 154.75,60.85 U1.29
NetR11_2: R11.2 U4.12 | length 6.5
  Top Layer w0.254: 120,82.5 120.425,82.925 U4.12
  Top Layer w0.6: 120,82.5 120,80.15 R11.2
NetR12_2: R12.2 U4.1 | length 6
  Top Layer w0.35: 120,91.25 121.175,90.075 U4.1
  Top Layer w0.6: 120,91.25 120,92.85 R12.2
NetR13_2: R13.2 U4.17 | length 11.1
  Top Layer w0.3: U4.17 132.225,85.525 133.25,84.5 R13.2@138.1,84.5
NetR21_2: R21.2 U1.65 | length 8.4
  Top Layer w0.254: R21.2@151.225,38.175 150.975,38.425 149.848,39.552 149.848,42.856 150.382,43.389 150.389,43.389 151.25,44.25 U1.65
NetR23_2: R23.2 U5.12 | length 6.1
  Top Layer w0.35: 82.75,82.5 83.175,82.925 U5.12
  Top Layer w0.6: 82.75,82.5 82.75,79.9 R23.2
NetR24_2: R24.2 U5.1 | length 6.2
  Top Layer w0.254: U5.1@83.425,90.075 U5.1
  Top Layer w0.35: 82.5,91 U5.1@83.425,90.075
  Top Layer w0.6: 82.5,91 82.5,92.85 R24.2
NetR25_2: R25.2 U5.17 | length 11.5
  Top Layer w0.254: U5.17 94.725,85.525 95.75,84.5 R25.2@101,84.5
NetR31_2: R31.2 U6.12 | length 6.3
  Top Layer w0.254: R31.2@46.6,78.55 R31.2
  Top Layer w0.35: 45,82.25 45.675,82.925 U6.12
  Top Layer w0.6: 45,82.25 45,80.15 R31.2@46.6,78.55
NetR32_2: R32.2 U6.1 | length 6.3
  Top Layer w0.35: 45,90.75 45.675,90.075 U6.1
  Top Layer w0.6: 45,90.75 45,92.85 R32.2
NetR33_2: R33.2 U6.17 | length 11.5
  Top Layer w0.35: U6.17 57.225,85.525 58.25,84.5 61.5,84.5 R33.2@63.5,84.5
NetR38_1: R38.1 U1.68 | length 110.6
  Top Layer w0.254: v1(145.675,110.45) R38.1 ; v1(152.138,43.363) 152.75,43.975 U1.68
  Bottom Layer w0.254: v1(145.675,110.45) 147.125,111.9 148.775,111.9 149.475,111.2 149.475,103.375 155.299,97.551 156.61,97.551 169.235,97.551 173.355,93.431 173.355,58.691 168.974,54.31 168.974,48.897 167.108,47.031 162.77,47.031 159.178,43.439 154.493,43.439 152.214,43.439 v1(152.138,43.363)
NetR39_1: R39.1 U1.69 | length 111.4
  Top Layer w0.254: v1(148.175,110.375) R39.1 ; v1(150.75,42.5) 150.75,42.3 152.75,42.3 153.236,42.786 153.236,45.436 U1.69
  Bottom Layer w0.254: v1@148.025,110.375 148.2,110.2 148.2,102.934 153.964,97.17 155.141,97.17 156.452,97.17 169.077,97.17 172.974,93.273 172.974,58.849 171.45,57.325 168.593,54.468 168.593,52.379 168.593,49.055 166.95,47.412 162.612,47.412 159.452,44.252 154.22,44.252 151.769,44.252 150.75,43.232 v1(150.75,42.5) 150.815,42.435 v1@150.894,42.435
NetR40_1: R40.1 U1.72 | length 103.8
  Top Layer w0.254: v1(150.675,110.375) R40.1 ; v1(154.25,42.5) 154.75,43 U1.72
  Bottom Layer w0.254: v1(150.675,110.375) 150.675,104.025 156.768,97.932 169.405,97.932 169.405,97.92 173.736,93.589 173.736,58.533 169.355,54.152 169.355,48.739 167.266,46.65 162.928,46.65 158.778,42.5 v1@154,42.5
NetR41_1: R41.1 U1.38 | length 60.8
  Top Layer w0.254: U1.38 150.25,61.461 147.501,64.21 147.501,74.12 147.501,81.001 156.988,90.488 156.988,98.973 153.175,102.786 R41.1
NetR42_1: R42.1 U1.37 | length 60
  Top Layer w0.254: U1.37 150.75,61.5 147.882,64.368 147.882,74.278 147.882,80.843 157.369,90.33 157.369,99.131 155.675,100.825 R42.1
NULL_ALFA: R6.2 U1.8 | length 65.5
  Top Layer w0.254: v1@145.542,93.042 R6.2 ; U1.8 163.75,50.75 v1(164.3,51.3)
  Bottom Layer w0.254: v1(145.5,93) 145.5,91.65 146.499,90.651 161.024,90.651 165.764,85.911 165.764,55.66 164.3,54.196 v1(164.3,51.3)
NULL_DELTA: R3.2 U1.10 U1.54 | length 122.7
  Top Layer w0.254: v1(141.25,48) 143.5,50.25 U1.54 ; v1(149.6,93) R3.2@149.6,95.36 ; U1.10 162.45,51.75 163.7,53 164.9,53 v1(165.9,54)
  Bottom Layer w0.254: v1(141.25,48) 144,50.75 144,51.711 144,54.29 144,55.459 144,56.72 144,57.156 144,57.399 144,58.117 144,82.818 144,91.961 144,92.277 144,93.789 144,93.85 144.614,94.464 149.136,94.464 149.6,94 v1(149.6,93) 149.6,91.925 150.112,91.413 161.34,91.413 166.526,86.227 166.526,78.642 166.526,70.581 166.526,54.626 v1(165.9,54)
NULL_FOCUS: R1.2 U1.53 | length 68.7
  Top Layer w0.254: v1(140,49.75) 141.5,49.75 142.5,50.75 U1.53 ; v1(153.7,93) R1.2@153.7,95.336
  Bottom Layer w0.254: v1(140,49.75) 141.5,49.75 143.619,51.869 143.619,54.448 143.619,55.616 143.619,56.878 143.619,57.314 143.619,57.557 143.619,58.275 143.619,82.661 143.619,91.803 143.619,92.435 143.619,94.008 144.456,94.845 153.055,94.845 153.7,94.2 v1(153.7,93)
POS_ALFA: R5.2 U1.5 U1.41 | length 110
  Top Layer w0.254: v1(145,61.3) 145,58.1 146.35,56.75 U1.41 ; v1@147.574,93.026 R5.2 ; U1.5 163.5,49.25 v1(164.175,48.575)
  Bottom Layer w0.254: 144.381,93.631 144.381,61.919 v1(145,61.3) ; 144.475,93.725 144.833,94.083 146.517,94.083 v1(147.6,93) 147.6,91.725 148.293,91.032 161.182,91.032 166.145,86.069 166.145,78.8 166.145,70.739 166.145,55.481 165.553,54.889 165.532,54.889 164.8,54.157 164.8,53.025 165.3,52.525 165.3,49.7 v1(164.175,48.575) v1@163.925,48.825
POS_DELTA: R4.2 U1.6 | length 64.8
  Top Layer w0.254: v1(151.6,93) R4.2@151.6,95.328 ; U1.6 164.6,49.75 v1(165.75,48.6)
  Bottom Layer w0.254: v1(151.6,93) 151.6,92.25 152.056,91.794 161.497,91.794 166.907,86.384 166.907,78.485 166.907,70.423 166.907,53.446 166.305,52.844 166.175,52.714 166.175,51.886 166.175,49.025 v1(165.75,48.6)
POSFOCUS: R2.2 U1.7 | length 62.1
  Top Layer w0.254: v1(155.7,93) R2.2@155.7,95.364 ; U1.7 166.775,50.25 v1(167.525,49.5) v1@167.2,49.175
  Bottom Layer w0.254: v1(155.7,93) 156.525,92.175 161.655,92.175 167.288,86.542 167.288,78.327 167.288,70.266 167.288,56.134 167.33,56.092 167.33,53.33 166.652,52.652 166.652,51.824 166.652,50.373 v1(167.525,49.5)
RESET: U1.18 U4.16 U5.16 U6.16 | length 247.8
  Top Layer w0.254: U6.16 55.625,84.875 v1(56.25,84.25) ; U5.16 93.125,84.875 v1(93.75,84.25) ; U4.16 130.875,84.875 v1@131.25,84.5 ; v1(128,53.5) v1(128,56.75) 130.175,56.75 v1(133.175,59.75) 133.725,60.3 141.95,60.3 143.95,62.3 144.65,63 v1@146.75,63 ; U1.18 162.395,55.75 164.1,57.455 164.1,61.7 164.05,61.75 163.953,61.75 v1(164,61.75)
  Bottom Layer w0.254: v1(56.25,84.25) 56.25,58.789 57.515,57.524 109.37,57.524 112.792,54.102 122.648,54.102 127.398,54.102 v1(128,53.5) ; v1(93.75,84.25) 93.75,61.989 96.31,59.429 110.159,59.429 113.513,56.075 127.325,56.075 v1(128,56.75) ; v1(131.25,84.25) 131.25,61.375 132.875,59.75 v1(133.175,59.75) ; v1(147,63) 147.625,63.625 162.375,63.625 164,62 v1(164,61.75)
STEPALFA: U1.43 U4.6 | length 66.5
  Top Layer w0.254: v1@116.25,86.75 v1(116.325,86.825) U4.6 ; v1@132.162,57.012 134.682,59.532 142.118,59.532 145.9,55.75 U1.43
  Bottom Layer w0.254: v1(116.325,86.825) 116.325,61.38 119.623,58.082 131.393,58.082 132.125,57.35 v1(132.125,57.05)
STEPDELTA: U1.73 U5.6 | length 126.1
  Top Layer w0.254: v1(78.825,86.825) U5.6 ; v1(155.25,38.5) U1.73
  Bottom Layer w0.254: v1(78.825,86.825) 78.825,65.325 85.864,58.286 109.686,58.286 113.108,54.864 128.808,54.864 130.107,53.565 130.107,48.527 142.11,36.524 150.774,36.524 152.75,38.5 154.75,38.5 155,38.25 v1(155.25,38.5)
STEPFOCUS: U1.56 U6.6 | length 144.4
  Top Layer w0.254: v1(41.25,86.825) U6.6 ; v1(128,51) 128,49 130.094,46.906 141.89,46.906 141.906,46.906 144.25,49.25 U1.56
  Bottom Layer w0.254: v1(41.25,86.825) 41.25,62.711 43.747,60.214 50.772,60.214 54.238,56.748 54.238,56.746 54.603,56.381 54.849,56.381 108.897,56.381 112.319,52.959 125.963,52.959 126.349,52.573 127.922,51 v1(128,51)
VCC: C20.1 C21.1 C22.1 C23.1 C24.1 C43.1 D1.2 J1.7 J2.7 J4.7 L1.1 P1.2 P2.1 R7.2 R13.1 R14.1 R25.1 R27.1 R33.1 R36.1 U1.24 U1.25 U1.32 U1.48 U1.60 U1.61 U1.66 U1.71 U2.4 U4.10 U5.10 U6.10 | length 581.2
  Top Layer w0.254: v1(144.675,47.925) 145.35,47.25 U1.60 ; U1.48 v1(149.875,53.25) ; U1.61 149.25,46.425 149.5,46.675 149.5,48.35 150.825,49.675 v1(151.725,49.675) 153.425,49.675 154.25,48.85 U1.71 ; U1.66 v1@151.75,49.65 ; U1.32 153.25,55.9 v1(153.617,55.533) 154.225,54.925 156.45,54.925 157.25,55.725 U1.24 U1.25
  Top Layer w0.3: R25.1 101.6,82.5 v1(112.5,82.5) 116.75,82.5 118.475,84.225 U4.10
  Top Layer w0.35: v1(37.5,81.25) 40.75,81.25 43.725,84.225 U6.10 ; 64.25,82.5 v1(75,82.5) 79.25,82.5 80.975,84.225 U5.10
  Top Layer w0.5: 138.5,61.25 R13.1 ; D1.2 R7.2@157.557,76.266 ; R7.2 160.523,73.3 161.075,73.3 v1@161.25,73.125
  Top Layer w1: v1(49.8,58.75) v1(75,58.75) 98.75,58.75 ; L1.1 108.839,50.839 108.5,50.5 C20.1 98.75,58.75 ; 126.25,58.75 126.25,48.75 129.25,45.75 142.5,45.75 v1(144.675,47.925) ; v1@145.838,65.737 141.35,61.25 138.5,61.25 132.5,61.25 130,58.75 v1(112.5,58.75) 98.75,58.75 ; v1(161.25,73.25) 162.75,74.75 172.75,74.75 ; P2.1 171.5,60.25 172.75,61.5 172.75,74.75 ; P1.2 171.21,81.29 172.75,79.75 172.75,74.75
  Bottom Layer w0.254: v1(149.875,53.25) v1@150.125,53.5
  Bottom Layer w0.5: C24.1 C24.1@147.6,52.95
  Bottom Layer w0.6: J4.7 49.515,122.3 ; J2.7 87.115,122.215 ; J1.7 J1.7@124.8,119.225
  Bottom Layer w1: R36.1@37.5,55 v1(37.5,81.25) 37.5,99.5 39.75,101.75 39.75,113.069 42.5,115.819 42.5,119.5 45.3,122.3 49.515,122.3 123.225,122.3 124.515,121.01 J1.7 ; 37.55,58.75 v1(49.8,58.75) ; v1(75,58.75) v1(75,82.5) ; v1(88.85,50.45) C20.1@98.7,50.45 ; v1(112.5,58.75) v1(112.5,82.5) ; v1(144.675,47.925) 147.625,47.925 ; v1(145.775,65.675) 160.175,65.675 161.25,66.75 v1(161.25,73.25) ; 147.6,47.95 C24.1 ; 147.6,50.35 151.8,50.35 ; C24.1@147.6,52.95 147.6,53.25 v1(149.875,53.25) 151.4,53.25 v1@153.4,55.25 ; v1@151.8,49.75 151.8,50.35 ; v1(153.617,55.533) C22.1@153.625,58.65 ; C21.1 151.8,50.35
  other v1: 87.1,46.95 88.85,46.95 90.6,46.95 87.1,48.7 88.85,48.7 90.6,48.7 87.1,50.45 90.6,50.45
pads on no net: *2.4 *2.5 *2.15 *2.16 D1.3 J1.9 J2.9 J4.9 P1.6 U1.1 U1.2 U1.14 U1.19 U1.20 U1.21 U1.22 U1.23 U1.27 U1.28 U1.33 U1.34 U1.39 U1.40 U1.42 U1.55 U1.74 U1.79 U1.80 U4.3 U5.3 U6.3

## Polygon pours and split planes (outlines as drawn)
VCC on Top Layer "Bottom Layer-No Net" (solid, remove dead copper): 44.6,59.5 44.6,40 110.062,40 110.062,55.5 127,55.5 127,59.5 44.6,59.5
GND on Top Layer "Bottom Layer-No Net" (solid, remove dead copper, pour order 1000): 196.09,283.08 196.09,183.08 346.09,183.08 346.09,283.08 196.09,283.08
VCC on Bottom Layer "Bottom Layer-No Net" (solid, remove dead copper): 37,59 37,40 108.5,40 108.5,55.5 54.5,55.5 50.5,59.5 37,59.5
GND on Bottom Layer "Bottom Layer-No Net" (solid, remove dead copper, pour order 1002): 30.322,282.516 30.322,182.516 180.322,182.516 180.322,282.516 30.322,282.516

## Silkscreen, mask and mechanical layers (free items; w line width, h text height)
Top Overlay:
  lines w0.254: 22.992,28.524 23.5,27 ; 22.992,125.476 23.5,127 ; 23.246,27 23.754,27 ; 23.246,127 23.754,127 ; 23.5,71.261 23.5,27 ; 23.5,82.739 23.5,127 ; 24.008,28.524 23.5,27 ; 24.008,125.476 23.5,127 ; 25.5,24.746 25.5,25.254 ; 27.024,24.492 25.5,25 ; 27.024,25.508 25.5,25 ; 94.761,25 25.5,25 ; 103.425,23.725 109.45,23.725 ; 106.239,25 175.5,25 ; 173.976,24.492 175.5,25 ; 173.976,25.508 175.5,25 ; 175.5,24.746 175.5,25.254
  text "100 (mm)" at 24.414,71.515 h1.52 r90
  text "150 (mm)" at 95.015,24.086 h1.52
Mechanical 1:
  lines w0.254: 25.5,27 25.5,127 175.5,127 175.5,27 25.5,27

## Text inside footprints (layer, text, board x,y; h text height)
C1: Top Overlay "+" at 54.585,50.931 h1.5 r90
C20: Top Overlay "+" at 98,52.55 h1.5 r270
Cool: Bottom Overlay "50 (mm)" at 57.061,87.302 h1.52 r180; Bottom Overlay "50 (mm)" at 125.333,91.218 h1.52 r90; Bottom Overlay "25 (mm)" at 130.083,78.718 h1.52 r90; Bottom Overlay "5.25 (mm)" at 128.076,70.263 h1.52 r90; Bottom Overlay "5.25 (mm)" at 128.068,115.013 h1.52 r90; Bottom Overlay "50 (mm)" at 50.333,91.218 h1.52 r90; Bottom Overlay "25 (mm)" at 55.083,78.718 h1.52 r90; Bottom Overlay "5.25 (mm)" at 53.076,70.263 h1.52 r90; Bottom Overlay "5.25 (mm)" at 53.068,115.013 h1.52 r90; Bottom Overlay "5.25 (mm)" at 90.568,115.013 h1.52 r90; Bottom Overlay "5.25 (mm)" at 90.576,70.263 h1.52 r90; Bottom Overlay "25 (mm)" at 92.583,78.718 h1.52 r90; Bottom Overlay "50 (mm)" at 87.833,91.218 h1.52 r90; Bottom Overlay "100 (mm)" at 81.426,87.302 h1.52 r180
J1: Top Overlay "6" at 121.245,122.045 h1.5; Top Overlay "9" at 129.555,122.045 h1.5; Top Overlay "5" at 130.94,112.645 h1.5; Top Overlay "1" at 120.11,112.645 h1.5
J2: Top Overlay "6" at 83.845,122.045 h1.5; Top Overlay "9" at 92.155,122.045 h1.5; Top Overlay "5" at 93.54,112.645 h1.5; Top Overlay "1" at 82.71,112.645 h1.5
J4: Top Overlay "6" at 46.245,122.045 h1.5; Top Overlay "9" at 54.555,122.045 h1.5; Top Overlay "5" at 55.94,112.645 h1.5; Top Overlay "1" at 45.11,112.645 h1.5
J5: Top Overlay "6" at 85.681,32.028 h1.5 r180; Top Overlay "9" at 77.371,32.028 h1.5 r180; Top Overlay "5" at 75.986,41.428 h1.5 r180; Top Overlay "1" at 86.816,41.428 h1.5 r180